# Altium PCB PowerBoardv2.PcbDoc (part 2 of 2)
Units mil, origin at the board's own origin, x right, y up, seen from the top; angles counter-clockwise.
Board outline 3917.32 x 2917.32 mil, 2 copper layers (Top Layer, Bottom Layer), stack 64.512 mil thick; 84 components, 73 nets, 331 pads, 371 vias.
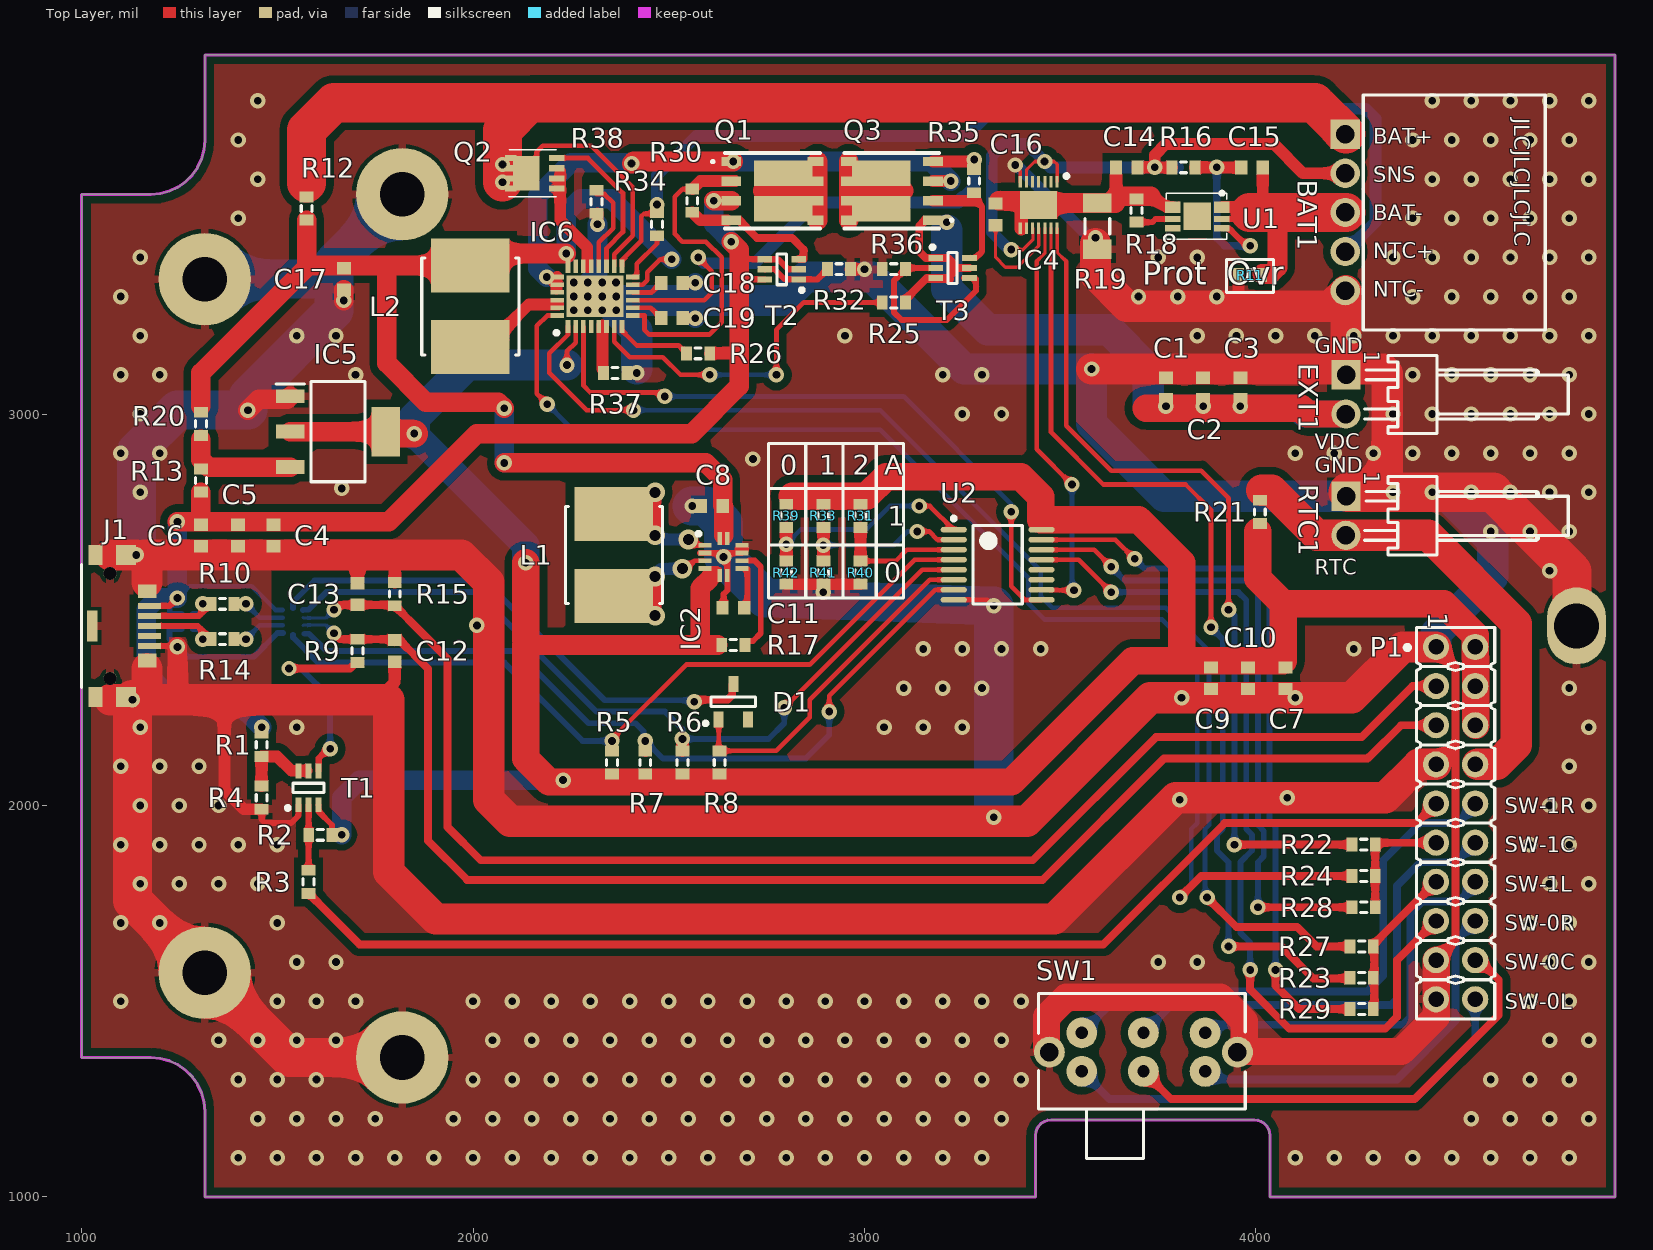
[diagram p0: Top Layer view]

## Via types
v1: diameter 39.37, hole 19.68, Top Layer to Bottom Layer, tented top, 353 vias
v2: diameter 35, hole 19.68, Top Layer to Bottom Layer, tented top, 12 vias
v3: diameter 50, hole 28, Top Layer to Bottom Layer, tented top, 6 vias

## Nets (pads, with @x,y where several pads share a name; then routed paths per layer and width w, separated by ;. In a path a pad name is that pad's centre, name@x,y a point inside that pad or via, vN(x,y) a via of type N, cw(c..) or ccw(c..) an arc to the next point about the centre after c; other vN are vias at no path point) (continued)
VIN: (continued)
  Top Layer w50: v1(2405,3640) 2410,3645 Q1.1 v1(2665,3645)
  Bottom Layer w50: v1(2188,3350) 2165.26,3372.74 2165.26,3557.26 2250.26,3642.26 2392.74,3642.26 2395,3640 v1(2405,3640) ; v1(2665,3645) 3170,3645 v1(3220,3595)
VRTC: P1.8 R21.1 RTC1.2 | length 1220.5
  Top Layer w80: 4015,2805 4040,2805 4155,2690 RTC1.2 4440,2690 4665,2465 4665,2155 4615,2105 P1.8@4566,2105
VSYS: C8.2 C17.2 IC2.11 IC2.12 IC6.13 IC6.21 IC6.22 L2.2 R12.2 R20.1 | length 3282.5
  Top Layer w12: IC6.13 2433.32,3330.32 2445.26,3342.26 2445.26,3362.26 2478,3395 v1(2508,3395)
  Top Layer w30: C8.2@2638.31,2767.72 2637.56,2766.97 C8.2 C8.2@2640,2762.56
  Top Layer w50: 1305,3020 1305,3105 1579.33,3379.33 ; R12.2 1575,3379.33 1579.33,3379.33 ; L2.2@1985,3387.33 L2.2 1775,3379.33 ; L2.2@2023.67,3410 v1(2238,3410) ; v1(2080,2875) 2595,2875 2637.56,2832.44 C8.2@2637.56,2766.97 ; v1(2080,3015) 2065,3030 1880,3030 1780,3130 1780,3374.33 1775,3379.33 ; 2640,2690 C8.2@2640,2762.56 ; 1579.33,3379.33 1775,3379.33
  Bottom Layer w50: v1(2080,2875) v1(2080,3015) ; v1(2238,3410) 2238,3513 2275,3550 2353,3550 v1(2508,3395)
WALLGT: IC6.11 Q3.4 R35.1 | length 1299.7
  Top Layer w12: IC6.11 2590.94,3290.94 2610,3310 2610,3365 v1(2575,3400)
  Top Layer w30: Q3.4 3272.46,3645 3277.46,3650 v1(3280,3650)
  Bottom Layer w30: v1(2575,3400) 2590,3385 2720,3385 2875,3540 3235,3540 3250,3555 ; 3240,3540 3280,3580 v1(3280,3650)
pads on no net: D1.2 IC3.2 IC3.5 IC4.2 IC4.3 IC4.4 IC4.5 IC6.4 J1.4 U1.0 U1.4 U2.11 U2.12

## Polygon pours and split planes (outlines as drawn)
GND on Bottom Layer "GND_FLOOD_BOTTOM" (solid, remove dead copper, pour order 0): 870,925 870,3955 5075,3955 5075,925
GND on Top Layer "GND_FLOOD_TOP" (solid, remove dead copper, pour order 2): 870,925 870,3955 5075,3955 5075,925

## Keep-outs
Keep-Out Layer:
  the board outline again, w8

## Other copper
Top Layer:
  pour cut-out: 4515,2445 4380,2445 4240,2305 3705,2305 3390,1990 2105,1990 2075,2020 2075,2550 1965,2660 1485,2660 1485,2290 1525,2250 1760,2250 1760,1830 1880,1710 3520,1710 3810,2000 4345,2000 4425,2080 4515,2080
Multi-Layer:
  pour cut-out: 2495,2455 2230,2455 2235,2460 2235,2825 2495,2825
  pour cut-out: 1870,3440 1870,3120 2115,3120 2115,3440

## Silkscreen, mask and mechanical layers (free items; w line width, h text height)
Top Overlay:
  lines w8: 2755,2665 3100,2665 ; 2755,2810 3100,2810 ; 2850,2925 2850,2530 ; 2935,2925 2945,2925 2945,2530 ; 3030,2530 3030,2925 ; 2850,2530 2945,2530 ; 2850,2530 2755,2530 2755,2925 3100,2925 3100,2530 2945,2530 ; 3925,3310 4045,3310 4045,3395 3925,3395 3925,3310
  text "JLCJLCJLCJLC" at 4660,3755 h39.37 r270
  text "BAT+" at 4300,3690 h39.37
  text "SNS" at 4300,3592.5 h39.37
  text "BAT-" at 4300,3495 h39.37
  text "NTC+" at 4300,3397.5 h39.37
  text "Prot  Ovr" at 3710,3330 h60
  text "NTC-" at 4300,3300 h39.37
  text "GND" at 4150,3155 h39.37
  text "VDC" at 4150,2910 h39.37
  text "GND" at 4150,2850 h39.37
  text "0" at 2785,2845 h50
  text "1" at 2885,2845 h50
  text "2" at 2970,2845 h50
  text "A" at 3050,2845 h50
  text "1" at 3060,2715 h50
  text "RTC" at 4150,2590 h39.37
  text "0" at 3050,2570 h50
  text "SW-1R" at 4635,1980 h39.37
  text "SW-1C" at 4635,1880 h39.37
  text "SW-1L" at 4635,1780 h39.37
  text "SW-0R" at 4635,1680 h39.37
  text "SW-0C" at 4635,1580 h39.37
  text "SW-0L" at 4635,1480 h39.37
Mechanical 1:
  lines w78.74: 960.63,1356.3 ccw(c1000,1356.3) 1000,1316.93 ; 960.63,1356.3 ccw(c1000,1356.3) 1000,1316.93 ; 960.63,1356.3 960.63,3561.02 ; 960.63,3561.02 cw(c1000,3561.02) 1000,3600.39 ; 960.63,3561.02 cw(c1000,3561.02) 1000,3600.39 ; 1000,1316.93 1175.45,1316.93 1194.23,1315.28 1210.78,1310.85 1226.3,1303.61 1240.33,1293.79 1252.45,1281.67 1262.27,1267.64 1269.51,1252.12 1273.95,1235.57 1275.59,1216.78 1275.59,1000 ; 1000,3600.39 1175.45,3600.39 1194.23,3602.04 1210.78,3606.47 1226.3,3613.71 1240.33,3623.54 1252.45,3635.65 1262.27,3649.68 1269.51,3665.21 1273.95,3681.75 1275.59,3700.54 1275.59,3917.32 ; 1275.59,1000 ccw(c1314.96,1000) 1314.96,960.63 ; 1275.59,1000 ccw(c1314.96,1000) 1314.96,960.63 ; 1275.59,3917.32 cw(c1314.96,3917.32) 1314.96,3956.69 ; 1275.59,3917.32 cw(c1314.96,3917.32) 1314.96,3956.69 ; 1314.96,960.63 3437.01,960.63 ; 1314.96,3956.69 4917.32,3956.69 ; 3437.01,960.63 ccw(c3437.01,1000) 3476.38,1000 ; 3437.01,960.63 ccw(c3437.01,1000) 3476.38,1000 ; 3476.38,1000 3476.38,1155.27 3476.6,1157.26 3478.59,1157.48 3993.85,1157.48 3995.84,1157.26 3996.06,1155.27 3996.06,1000 ; 3996.06,1000 ccw(c4035.43,1000) 4035.43,960.63 ; 3996.06,1000 ccw(c4035.43,1000) 4035.43,960.63 ; 4035.43,960.63 4917.32,960.63 ; 4917.32,960.63 ccw(c4917.32,1000) 4956.69,1000 ; 4917.32,960.63 ccw(c4917.32,1000) 4956.69,1000 ; 4917.32,3956.69 cw(c4917.32,3917.32) 4956.69,3917.32 ; 4917.32,3956.69 cw(c4917.32,3917.32) 4956.69,3917.32 ; 4956.69,1000 4956.69,3917.32

## Text inside footprints (layer, text, board x,y; h text height)
EXT1: Top Overlay "1" at 4276.97,3161.91 h39.37 r270; Mechanical 14 "1" at 4276.97,3161.91 h39.37 r270
P1: Top Overlay "1" at 4440.39,2493.46 h50 r270; Mechanical 14 "1" at 4440.39,2493.46 h47.24 r270
RTC1: Top Overlay "1" at 4276.97,2851.91 h39.37 r270; Mechanical 14 "1" at 4276.97,2851.91 h39.37 r270